# Altium PCB LCD_KB_CONTROLLER_hv2.PcbDoc (part 1 of 2)
Units mm, origin at the board's own origin, x right, y up, seen from the top; angles counter-clockwise.
Board outline 65 x 95 mm, 2 copper layers (Top Layer, Bottom Layer); 136 components, 106 nets, 445 pads, 363 vias.
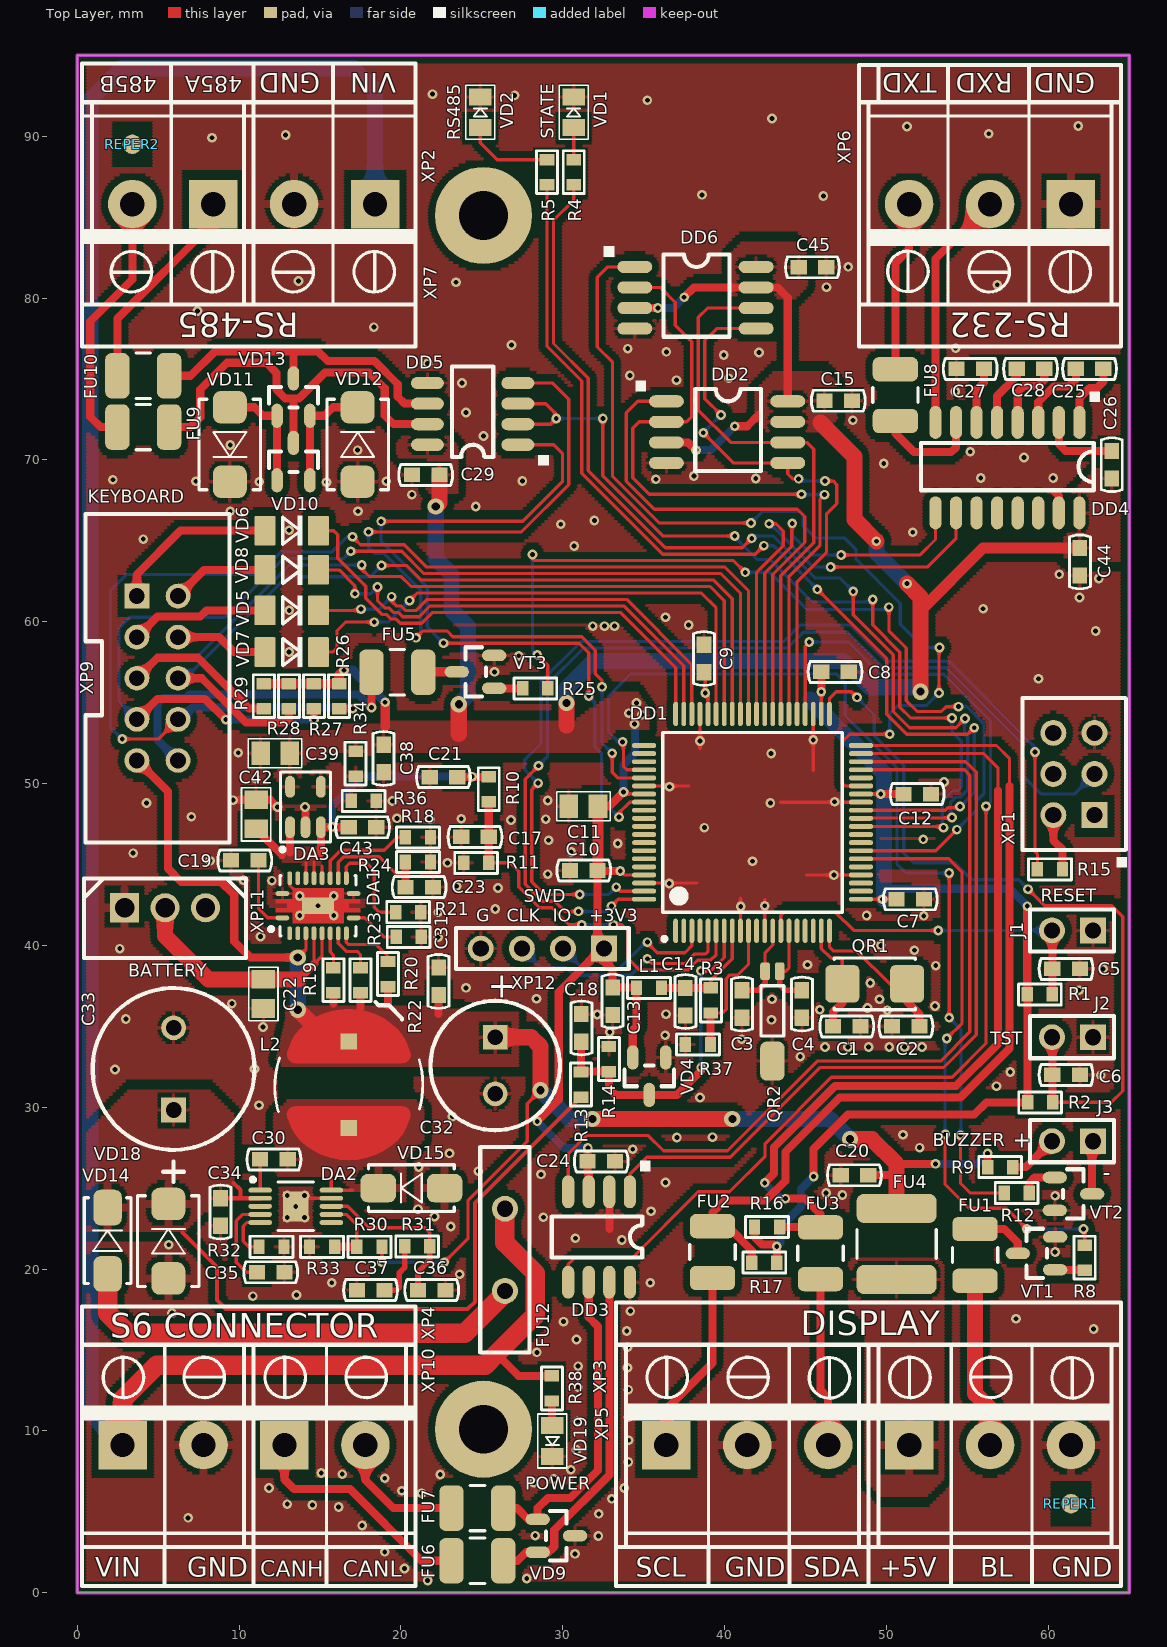
[diagram p0: Top Layer view]
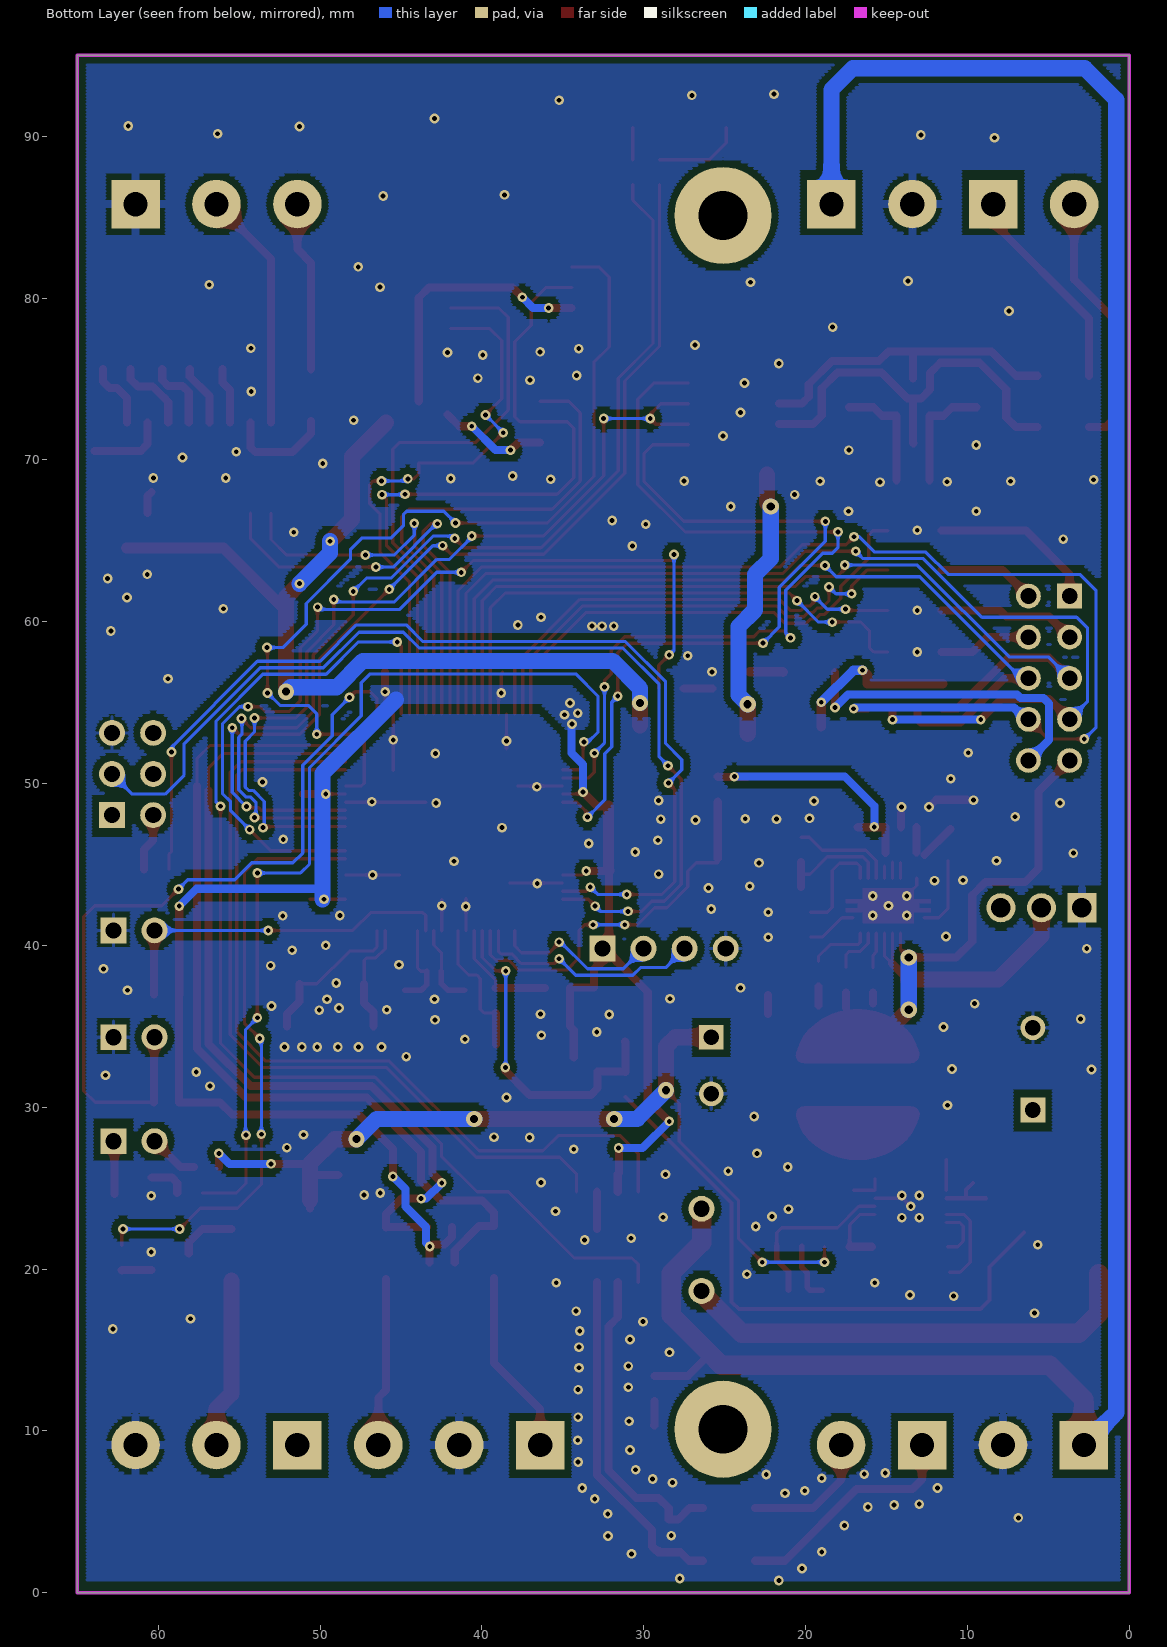
[diagram p1: Bottom Layer view, seen from below]

## Layer stack, top to bottom
Top Solder: solder mask 0.0102, Solder Resist, Dk 3.5
Top Layer: signal copper 0.0356
Dielectric 1: dielectric 0.32, FR-4, Dk 4.8
Bottom Layer: signal copper 0.0356
Bottom Solder: solder mask 0.0102, Solder Resist, Dk 3.5

## Board outline
0,0 0,95 65,95 65,0

## Design rules (kind name [scope] priority, off if disabled: settings)
Clearance Clearance_1 [InPolygon] p1: gap=0.4 ignorepadtopadclearanceinfootprint=FALSE
Clearance [All] p2: gap=0.2 ignorepadtopadclearanceinfootprint=FALSE
ComponentClearance [All] p1: gap=0.05 collisioncheckmode=3 verticalgap=2540 showdistances=FALSE
HoleSize [All] p1: absolutevalues=TRUE maxlimit=10 minlimit=0.025 maxpercent=80.000 minpercent=20.000
HoleToHoleClearance [All] p1: gap=0.05 allowstackedmicrovias=TRUE
MinimumSolderMaskSliver [All] p1: minsoldermaskwidth=0.04
PolygonConnect PolygonConnect_2 [IsVia OR InComponent('DA2') AND InNet('GND')] p1: connectstyle=Direct reliefconductorwidth=0.254 reliefentries=4 polygonreliefangle="90 Angle" airgapwidth=0.254
PolygonConnect [InComponent('VD18') OR InComponent('VD14') OR InComponent('VD15') OR InComponent('XP10') OR InComponent('XP5') OR InComponent('XP3') OR InComponent('XP6') OR InComponent('XP8') OR  InComponent('XP2') OR InComponent('XP11')] p2: connectstyle=Relief reliefconductorwidth=0.5 reliefentries=4 polygonreliefangle="90 Angle" airgapwidth=0.3
PolygonConnect PolygonConnect_1 [All] p3: connectstyle=Relief reliefconductorwidth=0.2 reliefentries=4 polygonreliefangle="90 Angle" airgapwidth=0.2
RoutingVias [All] p1: holewidth=0.4 width=0.8 viastyle="Through Hole" minholewidth=0.3 minwidth=0.6 maxholewidth=0.5 maxwidth=1
SilkToSilkClearance [All] p1: silktosilkclearance=0.05
SilkToSolderMaskClearance [IsPad] p1: minsilkscreentomaskgap=0.05 clearancetoexposedcopper=TRUE
SolderMaskExpansion [All] p1: expansion=0.102
Width [All] p1: maxlimit=3 minlimit=0.2 preferedwidth=0.5
24 further rules are at their usual default settings.

## Classes and differential pairs
component class [9]-Power: C30 C31 C32 C33 C34 C35 C36 C37 C38 C39 C42 C43 DA2 DA3 FU12 L2 R30 R31 R32 R33 R34 R36 R38 VD14 VD15 VD18 VD19
component class [8]-Interface_RS485: C29 DD5 FU9 FU10 VD10 VD11 VD12 VD13
component class [7]-Interface_RS232: C25 C26 C27 C28 C44 DD4 FU8
component class [6]-Interface_CAN: C24 DD3 FU6 FU7 VD9
component class [5]-Keyboard: FU5 R25 R26 R27 R28 R29 VD5 VD6 VD7 VD8 VT3
component class [4]-Battery: C19 C20 C21 C22 C23 DA1 R18 R19 R20 R21 R22 R23 R24 XP11
component class [3]-Connection: FU2 FU3 FU4 R15 R16 R17 XP1 XP2 XP3 XP4 XP5 XP6 XP7 XP9 XP10 XP12
component class [2]-Input: C17 C18 FU1 J3 R8 R9 R10 R11 R12 R13 R14 VD4 VT1 VT2
component class [1]-MCU: C1 C2 C3 C4 C5 C6 C7 C8 C9 C10 C11 C12 C13 C14 C15 C45 DD1 DD2 DD6 J1 J2 L1 QR1 QR2 R1 R2 R3 R4 R5 R37 REPER1 REPER2 U1 VD1 VD2

## Components (designator, comment, footprint, x,y, rotation, side; value= is the part's Value field where it differs from the comment)
C1 "22pF" CC0603#1 47.55,35 r180 top
C2 "22pF" CC0603#1 51.2,34.998 r0 top
C3 "22pF" CC0603#1 41.075,36.375 r90 top
C4 "22pF" CC0603#1 44.775,36.375 r90 top
C5 "220pF" CC0603#1 61.1,38.55 r180 top
C6 "220pF" CC0603#1 61.1,32 r180 top
C7 "0.1uF" CC0603#1 51.475,42.85 r180 top
C8 "0.1uF" CC0603#1 46.825,56.9 r180 top
C9 "0.1uF" CC0603#1 38.725,57.725 r270 top
C10 "0.1uF" CC0603#1 31.3,44.625 r0 top
C11 "10uFx6.3V" CC0805 31.275,48.6 r0 top
C12 "0.1uF" CC0603#1 51.9,49.35 r180 top
C13 "0.1uF" CC0603#1 33.075,36.55 r90 top
C14 "0.1uF" CC0603#1 37.575,36.525 r90 top
C15 "0.1uF" CC0603#1 47.025,73.65 r0 top
C17 "0.1uF" CC0603#1 24.575,46.7 r0 top
C18 "0.1uF" CC0603#1 31.15,34.9 r270 top
C19 "0.1uF" CC0603#1 10.35,45.25 r180 top
C20 "1uF" CC0603#1 48.025,25.8 r180 top
C21 "1uF" CC0603#1 22.625,50.4 r0 top
C22 "10uFx6.3V" CC0805 11.5,37 r90 top
C23 "10nF" CC0603#1 21.125,43.6 r0 top
C24 "0.1uF" CC0603#1 32.375,26.65 r0 top
C25 "0.1uF" CC0603#1 62.55,75.625 r0 top
C26 "0.1uF" CC0603#1 63.925,69.7 r90 top
C27 "0.1uF" CC0603#1 55.175,75.625 r0 top
C28 "0.1uF" CC0603#1 58.9,75.625 r0 top
C29 "0.1uF" CC0603#1 21.525,69.075 r0 top
C30 "0.1 uF" CC0603#1 12.15,26.775 r180 top
C31 "0.1 uF" CC0603#1 22.325,37.775 r90 top
C32 "1000uFx6.3V" CC8X3.5 25.825,34.325 r270 top
C33 "470uFx35V" CC16X10_CAP0.5(1)(PRIMARY) 5.95,29.825 r90 top
C34 "0.1 uF" CC0603#1 8.85,23.525 r270 top
C35 "10 nF" CC0603#1 11.95,19.8 r0 top
C36 "330pF" CC0603#1 21.9,18.698 r0 top
C37 "560pF" CC0603#1 18.125,18.7 r180 top
C38 "0.1uF" CC0603#1 18.925,51.55 r270 top
C39 "10uFx6.3V" CC0805 12.225,51.875 r0 top
C42 "10uF 6.3V" CC0805 11.05,48.1 r270 top
C43 "0.1uF" CC0603#1 17.625,47.3 r0 top
C44 "0.1uF" CC0603#1 61.95,63.7 r270 top
C45 "0.1uF" CC0603#2 45.425,81.9 r0 top
DA1 "BQ24070" P-PQFP-N20 14.875,42.45 r0 top
DA2 "TPS54260DGQ" S-PDSO-G10 11.3,24.875 r0 top
DA3 "AP2210K-ADJTRG1" SOT23-5 14.1,48.55 r90 top
DD1 "LPC1754FBD80" TQFP-80_0.5 41.725,47.6 r90 top
DD2 "M25PE16" EIAJ_SO8#1 36.407,73.62 r0 top
DD3 "SN65HVD234D" SO-8 34.145,24.775 r180 top
DD4 "ST232BD/CD" SO16_M 61.92,72.313 r270 top
DD5 "SP485EEN" SO-8 27.225,70.935 r90 top
DD6 "M25PE16" EIAJ_SO8#2 34.45,81.925 r0 top
FU1 "MICROSMD010F-2" RC1210 55.475,20.875 r270 top
FU2 "MICROSMD010F-2" RC1210 39.25,21.05 r90 top
FU3 "MICROSMD010F-2" RC1210 45.925,20.975 r90 top
FU4 "MF-SMDF050" MF-SMDF 50.625,21.55 r90 top
FU5 "MICROSMD010F-2" RC1210 19.775,56.875 r180 top
FU6 "MICROSMD010F-2" RC1210 24.725,1.975 r180 top
FU7 "MICROSMD010F-2" RC1210 24.725,5.225 r180 top
FU8 "MICROSMD010F-2" RC1210 50.55,74 r90 top
FU9 "MICROSMD010F-2" RC1210 4.075,72.025 r180 top
FU10 "MICROSMD010F-2" RC1210 4.075,75.2 r180 top
FU12 "RXE-110" RXE-110 26.425,23.725 r270 top
J1 "PLS-02" PLS-02 62.765,40.925 r180 top
J2 "PLS-02" PLS-02 62.765,34.325 r180 top
J3 "PLS-02" PLS-02 62.765,27.9 r180 top
L1 "10uH" L0603 34.551,37.375 r0 top
L2 "15uH" SDR0805 16.775,31.392 r90 top
QR1 "NX5032GA-12.000MHz LN-CD-1" AC5032_2 49.275,37.625 r0 top
QR2 "MS3V-T1R" MS3V-T1R 43.4,38.4 r270 top
R1 "10k" RC0603 59.476,36.975 r0 top
R2 "10k" RC0603 59.5,30.3 r0 top
R3 "1k5" RC0603 39.15,36.6 r270 top
R4 "1k" RC0603 30.675,87.775 r90 top
R5 "1k" RC0603 29.025,87.775 r90 top
R8 "10k" RC0603 62.25,20.7 r270 top
R9 "100E" RC0603 57.025,26.3 r180 top
R10 "12k1" RC0603 25.425,49.65 r90 top
R11 "20k1" RC0603 24.65,45.1 r0 top
R12 "100E" RC0603 58.05,24.7 r0 top
R13 "120k" RC0603 31.125,31.4 r90 top
R14 "10k" RC0603 32.85,32.975 r270 top
R15 "100E" RC0603 60.1,44.7 r0 top
R16 "2k2" RC0603 42.625,22.6 r180 top
R17 "2k2" RC0603 42.45,20.4 r0 top
R18 "51k" RC0603 21.05,46.675 r0 top
R19 "100k" RC0603 15.825,37.85 r270 top
R20 "100k" RC0603 19.2,38.225 r270 top
R21 "10k" RC0603 20.45,42.05 r0 top
R22 "100k" RC0603 17.5,37.85 r270 top
R23 "2k" RC0603 20.475,40.525 r0 top
R24 "36k" RC0603 21.05,45.15 r0 top
R25 "10k" RC0603 28.3,55.875 r180 top
R26 "4k7" RC0603 16.175,55.4 r270 top
R27 "4k7" RC0603 14.625,55.4 r270 top
R28 "4k7" RC0603 13.075,55.4 r270 top
R29 "4k7" RC0603 11.525,55.4 r270 top
R30 "68k1 1%" RC0603 18.05,21.375 r0 top
R31 "12k" RC0603 21,21.4 r0 top
R32 "240k" RC0603 12,21.375 r180 top
R33 "13k 1%" RC0603 15.125,21.375 r0 top
R34 "11k 1%" RC0603 17.2,51.225 r90 top
R36 "18k 1%" RC0603 17.7,48.925 r180 top
R37 "4k7" RC0603 38.35,33.875 r180 top
R38 "2k2" RC0603 29.325,12.625 r90 top
REPER1 "REPER1.2" REPER1.2 61.4,5.5 r90 top
REPER2 "REPER1.2" REPER1.2 3.4,89.5 r90 top
VD1 "LED_0805" LED0805 30.675,90.525 r90 top
VD2 "LED_0805" LED0805 24.9,90.525 r90 top
VD4 "BAT54S" SOT-23(GSD) 36.357,33.088 r180 top
VD5 "LL4148" SOD-80 13.25,60.7 r180 top
VD6 "LL4148" SOD-80 13.25,65.625 r180 top
VD7 "LL4148" SOD-80 13.25,58.125 r180 top
VD8 "LL4148" SOD-80 13.25,63.2 r180 top
VD9 "PESD2CAN" SOT-23(123) 28.437,4.532 r180 top
VD10 "BAV99" SOT-23(GSD) 12.343,68.726 r0 top
VD11 "SMBJ5.0A" SMB 9.425,70.95 r90 top
VD12 "SMBJ5.0A" SMB 17.325,70.95 r270 top
VD13 "BAV99" SOT-23(GSD) 12.343,72.712 r0 top
VD14 "GS1M" SMA 1.875,21.75 r90 top value={Value}
VD15 "SK34SMA" SMA 20.65,25 r180 top value={Value}
VD18 "SMBJ36A" SMB 5.625,21.725 r270 top
VD19 "LED_0805" LED0805 29.35,10.325 r270 top
VT1 "BC817-40" SOT-23(123) 60.438,19.95 r0 top
VT2 "BC817-40" SOT-23(123) 60.387,25.657 r180 top
VT3 "BC817-40" SOT-23(123) 25.774,55.884 r0 top
XP1 "PLD-06" PIN6 62.85,48.05 r90 top
XP2 "DG330-2PIN" DG330-2PIN 15.8,85.825 r180 top
XP3 "DG330-3PIN" DG330-3PIN 41.4,9.125 r0 top
XP4 "DG330-2PIN" DG330-2PIN 15.4,9.1 r0 top
XP5 "DG330-3PIN" DG330-3PIN 56.4,9.125 r0 top
XP6 "DG330-3P" DG330-3PIN 56.4,85.8 r180 top
XP7 "DG330-2PIN" DG330-2PIN 5.8,85.825 r180 top
XP9 "BH-10" BH-10 3.685,61.585 r270 top
XP10 "DG330-2PIN" DG330-2PIN 5.4,9.1 r0 top
XP11 "MW03D" MW03D 2.925,42.325 r0 top
XP12 "PLS04" PIN04S 32.55,39.8 r180 top

## Footprints (in the part's own frame and the unit in brackets; to place one, negate y for a bottom-side part, rotate by r counter-clockwise, add the part's x,y. Pads: shape width x height; smd on the part's side, far side on the other; paste and mask are expansions set on the pad)
AC5032_2 [mm]
  rrect30% 2.1x2.3 smd mask+0.05: 1(-2,0) 2(2,0)
  silkscreen extent -2.5,-1.6 2.5,1.6
BH-10 [mil]
  rect 60x60 hole 38 mask+1.97: 1(0,0)
  round 60 hole 38 mask+1.97: 2(0,100) 3(100,0) 4(100,100) 5(200,0) 6(200,100) 7(300,0) 8(300,100) 9(400,0) 10(400,100)
  silkscreen extent -200,-125 600,225
CC8X3.5 [mil]
  rect 60x60 hole 38 mask+1.97: 1(0,0)
  round 60 hole 38 mask+1.97: 2(137.8,0)
  silkscreen extent -89,-157 226,157
CC16X10_CAP0.5(1)(PRIMARY) [mil]
  round 60 hole 38 mask+1.97: 1(200,0)
  rect 60x60 hole 38 mask+1.97: 2(0,0)
  silkscreen extent -175,-197 297,197
CC0603#1 [mm]
  rect 1x0.9 smd paste-25.4 mask+0.05: 1(-0.85,0) 2(0.85,0)
  silkscreen extent -1.66,-0.65 1.66,0.65
CC0603#2 [mm]
  rect 1x0.9 smd paste-25.4: 1(-0.85,0) 2(0.85,0)
  silkscreen extent -1.66,-0.65 1.66,0.65, body extent -0.87,-0.47 0.88,0.48, height 0.85
CC0805 [mm]
  rect 1.15x1.45 smd paste-25.4 mask+0.05: 1(-0.9,0) 2(0.9,0)
  silkscreen extent -1.65,-0.9 1.65,0.9
DG330-2PIN [mm]
  rect 3x3 hole 1.5 mask+0.05: 1(-2.6,0.025)
  round 3 hole 1.5 mask+0.05: 2(2.4,0.025)
  silkscreen extent -5.1,-6.27 5.6,6.23
DG330-3PIN [mm]
  rect 3x3 hole 1.5 mask+0.05: 1(-5,0)
  round 3 hole 1.5 mask+0.05: 2(0,0) 3(5,0)
  silkscreen extent -8.1,-6.3 8.1,6.2
EIAJ_SO8#1 [mil]
  oval 85x29.53 smd mask+1.97: 1(0,0) 2(0,-50) 3(0,-100) 4(0,-150) 5(295,-150) 6(295,-100) 7(295,-50) 8(295,0)
  silkscreen extent -75,-170 230,50
EIAJ_SO8#2 [mil]
  oval 85x29.53 smd: 1(0,0) 2(0,-50) 3(0,-100) 4(0,-150) 5(295,-150) 6(295,-100) 7(295,-50) 8(295,0)
  silkscreen extent -75,-170 230,50, body extent -15,-170 307,20, height 67
L0603 [mm]
  rect 0.7x0.9 smd paste-25.4 mask+0.05: 1(0,0) 2(1.549,0)
  silkscreen extent -0.55,-0.65 2.1,0.65
LED0805 [mm]
  rect 1.05x1.4 smd paste-25.4 mask+0.05: 1(0,0) 2(1.9,0)
  silkscreen extent -0.72,-0.89 2.62,0.89
MF-SMDF [mm]
  rrect50% 1.8x4.95 smd mask+0.05: 1(-2.2,0) 2(2.2,0)
  silkscreen extent -0.9,-2.45 0.9,2.45
MS3V-T1R [mm]
  rrect50% 1.1x0.6 smd mask+0.05: 1(0,0) 2(0,-0.9)
  rrect50% 2.4x1.5 smd mask+0.05: 3(5.55,-0.45)
  silkscreen extent 0.9,-1.15 4,0.25
MW03D [mm]
  rect 1.8x1.8 hole 1.2 mask+0.05: 1(0,0)
  round 1.8 hole 1.2 mask+0.05: 2(2.5,0) 3(5,0)
  silkscreen extent -2.5,-3.1 7.5,1.8
P-PQFP-N20 [mm]
  oval 0.85x0.3 smd mask+0.05: 1(-2.2,-0.75) 10(2.2,-0.75) 11(2.2,0.75) 20(-2.2,0.75)
  oval 0.3x0.85 smd mask+0.05: 2(-1.75,-1.7) 3(-1.25,-1.7) 4(-0.75,-1.7) 5(-0.25,-1.7) 6(0.25,-1.7) 7(0.75,-1.7) 8(1.25,-1.7) 9(1.75,-1.7) 12(1.75,1.7) 13(1.25,1.7) 14(0.75,1.7) 15(0.25,1.7) 16(-0.25,1.7) 17(-0.75,1.7) 18(-1.25,1.7) 19(-1.75,1.7)
  rect 2x1 smd paste-25.4 mask+0.05: 21(0,0)
  Top Layer region: -1.575,-1.075 1.575,-1.075 1.575,-0.4 2.625,-0.4 2.625,-0.15 1.9,-0.15 1.9,0.15 2.625,0.15 2.625,0.4 1.575,0.4 1.575,1.075 -1.575,1.075 -1.575,0.4 -2.625,0.4 -2.625,0.15 -1.9,0.15 -1.9,-0.15 -2.625,-0.15 -2.625,-0.4 -1.575,-0.4
  silkscreen extent -3.02,-1.85 2.35,1.85
PIN04S [mm]
  rect 1.6x1.6 hole 1 mask+0.05: 1(0,0)
  round 1.6 hole 1 mask+0.05: 2(2.54,0) 3(5.08,0) 4(7.62,0)
  silkscreen extent -1.52,-1.27 9.14,1.27
PIN6 [mm]
  rect 1.6x1.6 hole 1 mask+0.05: 1(0,0)
  round 1.6 hole 1 mask+0.05: 2(0,2.54) 3(2.54,0) 4(2.54,2.54) 5(5.08,0) 6(5.08,2.54)
  silkscreen extent -2.16,-1.96 7.24,4.45
PLS-02 [mm]
  rect 1.6x1.6 hole 1 mask+0.05: 1(0,0)
  round 1.6 hole 1 mask+0.05: 2(2.54,0)
  silkscreen extent -1.3,-1.3 3.9,1.3
RC0603 [mm]
  rect 0.7x0.9 smd paste-25.4 mask+0.05: 1(-0.775,0) 2(0.774,0)
  silkscreen extent -1.32,-0.65 1.33,0.65
RC1210 [mm]
  rrect50% 1.5x2.8 smd mask+0.05: 1(-1.6,0) 2(1.6,0)
  silkscreen extent -0.45,-1.4 0.45,1.4
REPER1.2 [mm]
  round 1.2 smd paste-25.4 mask+0.05: 1(0,0)
  Top Layer pour cut-out: -1.35,-1.325 1.325,-1.325 1.325,1.325 -1.35,1.325
RXE-110 [mm]
  round 1.6 hole 1 mask+0.05: 1(0,0) 2(5.08,0)
  silkscreen extent -3.81,-1.52 8.89,1.52
S-PDSO-G10 [mm]
  oval 1.45x0.3 smd mask+0.05: 1(0,0) 2(0,-0.5) 3(0,-1) 4(0,-1.5) 5(0,-2) 6(4.4,-2) 7(4.4,-1.5) 8(4.4,-1) 9(4.4,-0.5) 10(4.4,0)
  rect 1.55x1.85 smd mask+0.05: 11(2.2,-1)
  silkscreen extent -0.57,-2.5 3.3,0.77
SDR0805 [mm]
  rect 1x1 smd paste-25.4 mask+0.05: 1(-2.667,0) 2(2.667,0)
  Top Layer region: -1.327,3.319 -1.362,3.503 -1.461,3.66 -1.612,3.771 -1.792,3.818 -1.977,3.797 -2.318,3.69 -2.706,3.535 -3.065,3.321 -3.387,3.053 -3.392,3.047 -3.771,2.627 -4.09,2.16 -4.345,1.654 -4.53,1.119 -4.642,0.565 -4.68,0 -4.642,-0.565 -4.53,-1.119 -4.345,-1.654 -4.09,-2.16 -3.771,-2.627 -3.392,-3.047 -3.381,-3.059 -3.063,-3.323 -2.709,-3.534 -2.325,-3.688 -1.996,-3.791 -1.806,-3.813 -1.62,-3.764 -1.465,-3.65 -1.363,-3.488 -1.327,-3.299
  Top Layer region: 1.327,-3.319 1.362,-3.503 1.461,-3.66 1.612,-3.771 1.792,-3.818 1.977,-3.797 2.318,-3.69 2.706,-3.535 3.065,-3.321 3.387,-3.053 3.392,-3.047 3.771,-2.627 4.09,-2.16 4.345,-1.654 4.53,-1.119 4.642,-0.565 4.68,0 4.642,0.565 4.53,1.119 4.345,1.654 4.09,2.16 3.771,2.627 3.392,3.047 3.381,3.059 3.063,3.323 2.709,3.534 2.325,3.688 1.996,3.791 1.806,3.813 1.62,3.764 1.465,3.65 1.363,3.488 1.327,3.299
  silkscreen extent -1.66,-4.57 1.64,4.57
SMA [mm]
  rrect50% 2.2x1.75 smd mask+0.05: 1(-2.05,0) 2(2.05,0)
  silkscreen extent -2.65,-1.45 2.65,1.45
SMB [mm]
  rrect50% 2x2.1 smd mask+0.05: 1(2.3,0) 2(-2.3,0)
  silkscreen extent -2.8,-1.9 2.8,1.9
SO16_M [mil]
  oval 80x29.53 smd mask+1.97: 1(0,0) 2(0,-50) 3(0,-100) 4(0,-150) 5(0,-200) 6(0,-250) 7(0,-300) 8(0,-350) 9(220,-350) 10(220,-300) 11(220,-250) 12(220,-200) 13(220,-150) 14(220,-100) 15(220,-50) 16(220,0)
  silkscreen extent -75,-385 165,50
SO-8 [mil]
  oval 29.53x80 smd mask+1.97: 1(0,0) 2(50,0) 3(100,0) 4(150,0) 5(150,220) 6(100,220) 7(50,220) 8(0,220)
  silkscreen extent -50,-75 190,160
SOD-80 [mm]
  rrect10% 1.3x1.83 smd paste-25.4 mask+0.05: 1(1.651,0) 2(-1.651,0)
  silkscreen extent -0.66,-0.91 0.56,0.91
SOT23-5 [mm]
  oval 1.35x0.6 smd mask+0.05: 1(-1.25,0.95) 2(-1.25,0) 3(-1.25,-0.95) 4(1.25,-0.95) 5(1.25,0.95)
  silkscreen extent -2.74,-1.55 2.16,1.55
SOT-23(123) [mil]
  oval 59.06x28.07 smd mask+1.97: 1(-0.5,0) 2(-0.5,80) 3(-91.5,40)
  silkscreen extent -71,-20 -21,100
SOT-23(GSD) [mil]
  oval 28.07x59.06 smd mask+1.97: 1(0,0.5) 2(80,0.5) 3(40,91.5)
  silkscreen extent -20,21 100,71
TQFP-80_0.5 [mm]
  oval 1.5x0.3 smd mask+0.05: 1(-6.7,4.75) 2(-6.7,4.25) 3(-6.7,3.75) 4(-6.7,3.25) 5(-6.7,2.75) 6(-6.7,2.25) 7(-6.7,1.75) 8(-6.7,1.25) 9(-6.7,0.75) 10(-6.7,0.25) 11(-6.7,-0.25) 12(-6.7,-0.75) 13(-6.7,-1.25) 14(-6.7,-1.75) 15(-6.7,-2.25) 16(-6.7,-2.75) 17(-6.7,-3.25) 18(-6.7,-3.75) 19(-6.7,-4.25) 20(-6.7,-4.75) 41(6.7,-4.75) 42(6.7,-4.25) 43(6.7,-3.75) 44(6.7,-3.25) 45(6.7,-2.75) 46(6.7,-2.25) 47(6.7,-1.75) 48(6.7,-1.25) 49(6.7,-0.75) 50(6.7,-0.25) 51(6.7,0.25) 52(6.7,0.75) 53(6.7,1.25) 54(6.7,1.75) 55(6.7,2.25) 56(6.7,2.75) 57(6.7,3.25) 58(6.7,3.75) 59(6.7,4.25) 60(6.7,4.75)
  oval 0.3x1.5 smd mask+0.05: 21(-4.75,-6.7) 22(-4.25,-6.7) 23(-3.75,-6.7) 24(-3.25,-6.7) 25(-2.75,-6.7) 26(-2.25,-6.7) 27(-1.75,-6.7) 28(-1.25,-6.7) 29(-0.75,-6.7) 30(-0.25,-6.7) 31(0.25,-6.7) 32(0.75,-6.7) 33(1.25,-6.7) 34(1.75,-6.7) 35(2.25,-6.7) 36(2.75,-6.7) 37(3.25,-6.7) 38(3.75,-6.7) 39(4.25,-6.7) 40(4.75,-6.7) 61(4.75,6.7) 62(4.25,6.7) 63(3.75,6.7) 64(3.25,6.7) 65(2.75,6.7) 66(2.25,6.7) 67(1.75,6.7) 68(1.25,6.7) 69(0.75,6.7) 70(0.25,6.7) 71(-0.25,6.7) 72(-0.75,6.7) 73(-1.25,6.7) 74(-1.75,6.7) 75(-2.25,6.7) 76(-2.75,6.7) 77(-3.25,6.7) 78(-3.75,6.7) 79(-4.25,6.7) 80(-4.75,6.7)
  silkscreen extent -7.32,-5.55 5.55,5.57

## Part data
C1 C2 C3 C4 C5 C6 C7 C8 C9 C10 C12 C13 C14 C15 C17 C18 C19 C20 C21 C23 C24 C25 C26 C27 C28 C29 C30 C31 C34 C35 C36 C37 C38 C43 C44 C45: library part CC0603, "CC0603"
C11 C22 C39 C42: library part CC0805, "CC0805"
C32: library part CAP0.35, "CAP0.35"
C33: library part CAP0.5(1), "CAP0.5(1)"
DA3: library part MCP1824T-ADJE/OT, "300 mA, Low Voltage, Low Quiescent Current LDO Regulator, 5-Pin SOT-223, Extended Temperature, Tape and Reel", ComponentLink1Description="Manufacturer Link", ComponentLink1URL=http://www.microchip.com, ComponentLink2Description=Datasheet, ComponentLink2URL=http://ww1.microchip.com/downloads/en/DeviceDoc/22070a.pdf, ComponentLink3Description="Packaging Specification", ComponentLink3URL=http://ww1.microchip.com/downloads/en/PackagingSpec/00049AW.pdf, DatasheetVersion="revA, Aug-2007", PackageDescription="5-Lead Plastic Small Outline Transistor (DC) [SOT-223]", PackageReference=SOT-223-DC5, PackageVersion="revAW, Oct-2008", Published=29-Jan-2009, Publisher="Altium Limited"
DD1: "Cortex -M3 32-Bit Microcontroller, 128KB Flash, 64KB RAM, 800-Lead LQFP", ComponentLink1Description="Manufacturer Link", ComponentLink1URL=http://www.nxp.com/
DD2 DD6: library part S25FL016A0LMFI01, "S25FL016A0LMFI01"
DD3: "CAN Transceiver"
DD5: library part SP485, "SP485"
FU1 FU2 FU3 FU5 FU6 FU7 FU8 FU9 FU10: library part MICROSMD, "MICROSMD"
FU4: library part MF-SMDF, "MF-SMDF"
L1: library part L0603, "L0603"
L2: library part SDR0805, "SDR0805"
QR1: library part AC5032_2, "AC5032/2"
QR2: "CRYSTAL_32768 Hz"
R1 R2 R3 R4 R5 R8 R9 R10 R11 R12 R13 R14 R15 R16 R17 R18 R19 R20 R21 R22 R23 R24 R25 R26 R27 R28 R29 R30 R31 R32 R33 R34 R36 R37 R38: library part RC0603, "RC0603"
VD4 VD10 VD13: "1.0 Ampere General Purpose Rectifier", ComponentField6="Published 8-Jun-2000, Modified 11-July-2000: SIM Model Added."
VD9: "TVS for CAN"
VD11 VD12: library part SMBJ, "SMBJ"
VD15: "Schottky Rectifier"
VD18: library part SMBJ
VT1 VT2 VT3: library part BC846BLT1, "NPN 500ma transistor", ComponentField7="Published 29-Sep-2000", OriginalName=BC846BLT1
XP1: "PLD06"
XP6: library part DG330-3PIN

## Free pads (board coordinates)
  round 6 hole 3 unplated mask+0.05: 0(25.1,10.1) 0(25.1,85.1)

## Via types
v1: diameter 0.6, hole 0.3, Top Layer to Bottom Layer, tented both sides, 352 vias
v2: diameter 1, hole 0.5, Top Layer to Bottom Layer, tented both sides, 10 vias
v3: diameter 0.6, hole 0.3, Top Layer to Bottom Layer, 1 vias

## Nets (pads, with @x,y where several pads share a name; then routed paths per layer and width w, separated by ;. In a path a pad name is that pad's centre, name@x,y a point inside that pad or via, vN(x,y) a via of type N, cw(c..) or ccw(c..) an arc to the next point about the centre after c; other vN are vias at no path point)
485_A: FU10.2 XP7.1 | length 13.1
  Top Layer w0.5: FU10.2@2.475,75.2 2.475,78.725 8.4,84.65 XP7.1@8.4,85.8
485_B: FU9.2 XP7.2 | length 16.2
  Top Layer w0.5: FU9.2@2.475,72.025 1.425,72.025 0.8,72.65 0.8,78.55 3.4,81.15 XP7.2@3.4,85.8
+3V3: C7.2 C8.2 C9.2 C10.2 C11.2 C12.2 C13.2 C15.1 C24.1 C26.1 C29.2 C38.1 C39.2 C44.1 C45.1 DA3.5 DD1.21 DD1.34 DD1.42 DD1.56 DD1.67 DD1.77 DD2.3 DD2.7 DD2.8 DD3.3 DD4.16 DD5.8 DD6.3 DD6.7 DD6.8 L1.1 R1.1 R2.1 R16.2 R17.2 R26.1 R27.1 R28.1 R29.1 R34.2 VD4.2 XP12.1 | length 224.5
  Top Layer w0.2: v1(33.55,44.6) 33.8,44.35 DD1.77@35.025,44.35 ; v1(33.75,49.475) 33.875,49.35 DD1.67@35.025,49.35 ; C9.2@38.725,56.875 38.8,56.8 v1(38.8,55.6) 38.975,55.425 DD1.56@38.975,54.3 ; DD1.42@45.975,54.3 v1(45.975,55.675) ; DD1.21@48.425,42.85 v1(49.75,42.85) C7.2@50.625,42.85 ; DD1.34@48.425,49.35 v1(49.65,49.35)
  Top Layer w0.5: v1(28.425,29.125) 29.75,30.45 29.75,37.125 XP12.1@32.15,39.525 ; v1(31.55,27.475) 31.525,27.45 C24.1@31.525,26.65 31.525,25.95 31.605,25.87 DD3.3@31.605,24.775 ; v1(33.55,44.6) 32.175,44.6 C10.2@32.15,44.625 XP12.1@32.15,39.525 ; VD4.2@34.325,33.075 34.325,34.775 34.551,35.001 L1.1@34.551,37.375 34.526,37.4 C13.2@33.075,37.4 33.075,38.5 32.15,39.425 XP12.1@32.15,39.525 ; DD6.3@34.45,79.385 v1(35.875,79.385) ; DD2.3@36.407,71.08 37.744,71.08 v1(38.225,70.599) ; v1(37.5,80.05) 38.105,80.655 DD6.7@41.943,80.655 43.265,80.655 43.9,80.02 DD2.8@43.9,73.62 ; v1(40.625,72.075) 41.4,72.075 42.125,72.8 ; R16.2@41.851,22.6 41.851,21.974 42.3,21.525 43.025,21.525 v1@43.224,21.325 ; R17.2@43.224,20.4 v1@43.224,21.325 ; v1(43.224,21.399) v1@43.224,21.325 ; v1(45.5,25.725) 45.5,27.425 47.625,29.55 55.425,29.55 56.175,30.3 R2.1@58.725,30.3 58.725,36.951 R1.1@58.701,36.975 v1(58.701,42.424) ; v1(45.975,55.675) C8.2@45.975,56.9 ; v1(49.65,49.35) C12.2@51.05,49.35
  Top Layer w0.52: C11.2@32.175,48.6 32.875,48.6 v1(33.75,49.475)
  Top Layer w0.6: R29.1@11.525,56.175 R28.1@13.075,56.175 R27.1@14.625,56.175 R26.1@16.175,56.175 16.175,56.7 v1(16.475,57) ; 19.025,53.525 v1(19.025,55.025)
  Top Layer w0.7: C10.2@32.15,44.625 32.175,44.65 C11.2@32.175,48.6 ; 52.1,60.675 55.975,64.55 C44.1@61.95,64.55
  Top Layer w1: v2(22.15,67.125) 22.375,67.35 C29.2@22.375,69.075 ; 23.575,53.075 v2(23.575,54.9) ; 30.225,53.6 v2(30.225,54.975) v2@30.25,54.95 ; 45.925,72.3 48.025,70.2 48.025,66.325 v1(49.375,64.975) ; v1(51.275,62.35) 52.1,61.525 52.1,60.675 v2(52.1,55.675)
  Bottom Layer w0.5: v1(28.425,29.125) 30.075,27.475 v1(31.55,27.475) ; v1(35.875,79.385) 36.835,79.385 v1(37.5,80.05) ; v1(38.225,70.599) 39.149,70.599 v1(40.625,72.075) ; v1(43.224,21.399) 43.45,21.625 43.45,22.6 44.725,23.875 44.725,24.95 v1(45.5,25.725) ; 49.85,43.5 57.625,43.5 v1(58.701,42.424)
  Bottom Layer w0.52: v1(33.75,49.475) 33.75,51.175 34.46,51.885 34.46,53.64 v1(34.425,53.675)
  Bottom Layer w0.6: v1(16.475,57) 17.05,57 v1(19.025,55.025)
  Bottom Layer w1: v2(22.15,67.125) 22.15,63.9 23.125,62.925 23.125,60.725 24.15,59.7 24.15,55.475 v2(23.575,54.9) ; v2(30.225,54.975) 30.225,55.875 31.925,57.575 47.35,57.575 48.975,55.95 51.825,55.95 v2(52.1,55.675) ; 45.3,55.175 49.85,50.625 49.85,43.5 v1@49.85,42.85 ; v1(49.375,64.975) 49.375,64.25 v1(51.275,62.35)
  other v1: 34.9,54.25 34.075,54.35 34.55,54.975
+5V: C20.1 C31.1 C32.1 DA1.4 FU4.2 L2.2 R9.2 R19.2 R20.2 R22.2 R30.2 XP9.9 | length 89.1
  Top Layer w0.2: v2(13.625,39.25) 14.125,39.75 DA1.4@14.125,40.75 ; v1(18.824,20.424) R30.2@18.824,21.375 ; v1(22.674,20.424) 24.15,21.9 24.15,24.251 27.8,27.901 27.8,30.225 v2(28.625,31.05)
  Top Layer w0.5: XP9.9@3.685,51.425 5.6,49.51 5.6,44.75 6.425,43.925 8.875,43.925 9.7,43.1 9.7,40.25 10.7,39.25 v2(13.625,39.25) ; 15.825,36.4 R19.2@15.825,37.076 ; 17.5,36.125 R22.2@17.5,37.076 ; 19.2,36.275 R20.2@19.2,37.451 ; 22.325,35.75 C31.1@22.325,36.925 ; C20.1@48.875,25.8 50.35,25.8 50.625,25.525 ; FU4.2@50.625,23.75 FU4.2@50.625,24.25 ; 50.625,26.5 v1(53.025,26.5) ; R9.2@56.251,26.3 v1(56.251,27.149)
  Top Layer w1: v2(13.625,36.025) 14.925,34.725 ; C32.1@25.825,34.325 28.05,34.325 28.625,33.75 v2(28.625,31.05) ; v2(31.825,29.275) v2(40.475,29.275) ; v2(47.75,28.025) 49.1,28.025 50.625,26.5 50.625,25.525 FU4.2@50.625,24.25
  Bottom Layer w0.2: v1(18.824,20.424) v1(22.674,20.424)
  Bottom Layer w0.5: v1(53.025,26.5) 55.601,26.5 v1(56.251,27.149)
  Bottom Layer w1: v2(13.625,36.025) v2(13.625,39.25) ; v2(28.625,31.05) 30.4,29.275 v2(31.825,29.275) ; v2(40.475,29.275) 46.5,29.275 v2(47.75,28.025)
BL: FU1.2 XP5.2 | length 10.5
  Top Layer w1: FU1.2@55.475,19.275 55.475,12.3 56.4,11.375 XP5.2@56.4,9.125
BL_7SEG: DD1.26 R8.1 | length 37
  Top Layer w0.2: DD1.26@48.425,45.35 53.849,45.35 54.675,44.524 54.675,35.2 v1(53.725,34.25) ; v1(53.625,28.325) 53.625,25.225 55.1,23.75 57.4,23.75 v1(58.675,22.475) ; v1(62.175,22.475) 62.25,22.4 R8.1@62.25,21.475
  Bottom Layer w0.2: v1(53.625,28.325) 53.625,34.15 v1(53.725,34.25) ; v1(58.675,22.475) v1(62.175,22.475)
BL_KEYBOARD: DD1.27 R25.1 | length 57.9
  Top Layer w0.2: v1(28.125,64.15) 28.125,63.9 28.25,63.775 40.55,63.775 v1(41.275,63.05) ; v1(28.425,57.95) 29.075,57.3 R25.1@29.075,55.875 ; DD1.27@48.425,45.85 53.05,45.85 v1(54.35,47.15) ; v1(50.15,60.9) 50.15,59.45 51.225,58.375 51.225,55.125 51.9,54.45 53.388,54.45 53.688,54.75 v1(54.45,54.75)
  Bottom Layer w0.2: v1(28.125,64.15) 28.125,58.25 v1(28.425,57.95) ; v1(41.275,63.05) 42.8,63.05 45.1,60.75 50,60.75 v1(50.15,60.9) ; v1(54.35,47.15) 55.525,48.325 55.525,48.875 56.025,49.375 56.025,53.7 54.975,54.75 v1(54.45,54.75)
BUZZER: DD1.64 R12.1 | length 60.1
  Top Layer w0.2: v1(33.7,52.575) 33.75,52.525 33.75,51.05 33.95,50.85 DD1.64@35.025,50.85 ; v1(53.875,35.525) v1(53.875,44.475) ; v1(54.575,28.275) 54.575,25.3 55.175,24.7 R12.1@57.275,24.7
  Bottom Layer w0.2: v1(33.7,52.575) 33.425,52.575 32.825,53.175 32.825,55.4 34.2,56.775 46.9,56.775 47.45,56.225 47.45,54.184 50.65,50.984 50.65,45.025 51.2,44.475 v1(53.875,44.475) ; v1(53.875,35.525) 54.6,34.8 54.6,28.3 v1(54.575,28.275)
CAN_D: DD1.38 DD3.1 | length 49.7
  Top Layer w0.2: DD3.1@34.145,24.775 34.145,25.87 35.178,26.903 40.344,26.903 45.891,32.45 53.525,32.45 55.55,34.475 55.55,50.691 54.891,51.35 DD1.38@48.425,51.35
CAN_EN: DD1.44 DD3.5 | length 70.8
  Top Layer w0.2: DD3.5@30.335,19.187 30.335,20.285 30.725,20.675 34.275,20.675 38.375,24.775 40.3,24.775 42.5,26.975 42.5,27.753 46.597,31.85 54.057,31.85 56.15,33.943 v1(56.15,48.6) ; DD1.44@44.975,54.3 44.975,58.5 v1(45.225,58.75)
  Bottom Layer w0.2: v1(45.225,58.75) 47.625,58.75 49.625,56.75 53.541,56.75 56.425,53.866 56.425,48.875 v1(56.15,48.6)
CAN_H: FU6.2 XP4.1 | length 14.5
  Top Layer w0.5: XP4.1@12.8,9.125 12.8,7 13.4,6.4 16.85,6.4 21.275,1.975 FU6.2@23.125,1.975
CAN_L: FU7.2 XP4.2 | length 8.2
  Top Layer w0.5: XP4.2@17.8,9.125 17.8,6.95 19.525,5.225 FU7.2@23.125,5.225
CAN_R: DD1.37 DD3.4 | length 53.8
  Top Layer w0.2: DD3.4@30.335,24.775 30.335,27.135 31.45,28.25 35.275,28.25 36.222,27.303 40.178,27.303 45.725,32.85 53.35,32.85 55.15,34.65 55.15,50.525 54.825,50.85 DD1.37@48.425,50.85
COL1: DD1.60 VD6.2 | length 30.3
  Top Layer w0.2: VD6.2@14.901,65.625 15.85,65.625 16.1,65.375 16.1,63.925 17.825,62.2 17.825,61.45 18.825,60.45 19.094,60.45 19.369,60.175 19.67,60.175 19.945,59.9 21.284,59.9 21.959,60.575 33.55,60.575 36.975,57.15 DD1.60@36.975,54.3
COL2: DD1.59 VD8.2 | length 29.7
  Top Layer w0.2: VD8.2@14.901,63.2 16.175,63.2 17.15,62.225 v1(17.15,61.725) ; v1(18.55,62.15) 18.55,61.291 18.991,60.85 19.259,60.85 19.534,60.575 19.836,60.575 20.111,60.3 21.119,60.3 21.794,60.975 33.775,60.975 37.475,57.275 DD1.59@37.475,54.3
  Bottom Layer w0.2: v1(17.15,61.725) 18.125,61.725 v1(18.55,62.15)
COL3: DD1.58 VD5.2 | length 28.9
  Top Layer w0.2: VD5.2@14.901,60.7 17.45,60.7 v1(17.525,60.775) ; v1(19.425,61.55) 19.425,61.25 19.7,60.975 20.001,60.975 20.276,60.7 20.953,60.7 21.628,61.375 33.941,61.375 37.975,57.341 DD1.58@37.975,54.3
  Bottom Layer w0.2: v1(17.525,60.775) 18.65,60.775 v1(19.425,61.55)
COL4: DD1.55 VD7.2 | length 33.6
  Top Layer w0.2: VD7.2@14.901,58.125 15.775,58.125 16.05,58.4 16.05,59.45 16.575,59.975 v1(18.35,59.975) ; v1(20.525,61.3) 21,61.775 38.55,61.775 39.475,60.85 DD1.55@39.475,54.3
  Bottom Layer w0.2: v1(18.35,59.975) 19.2,59.975 v1(20.525,61.3)
DQ: DD1.36